# Altium PCB WeatherClock.pcbdoc
Units mm, origin at the board's own origin, x right, y up, seen from the top; angles counter-clockwise.
Board outline 60.43 x 55.02 mm, 2 copper layers (Top Layer, Bottom Layer); 34 components, 26 nets, 125 pads, 75 vias.
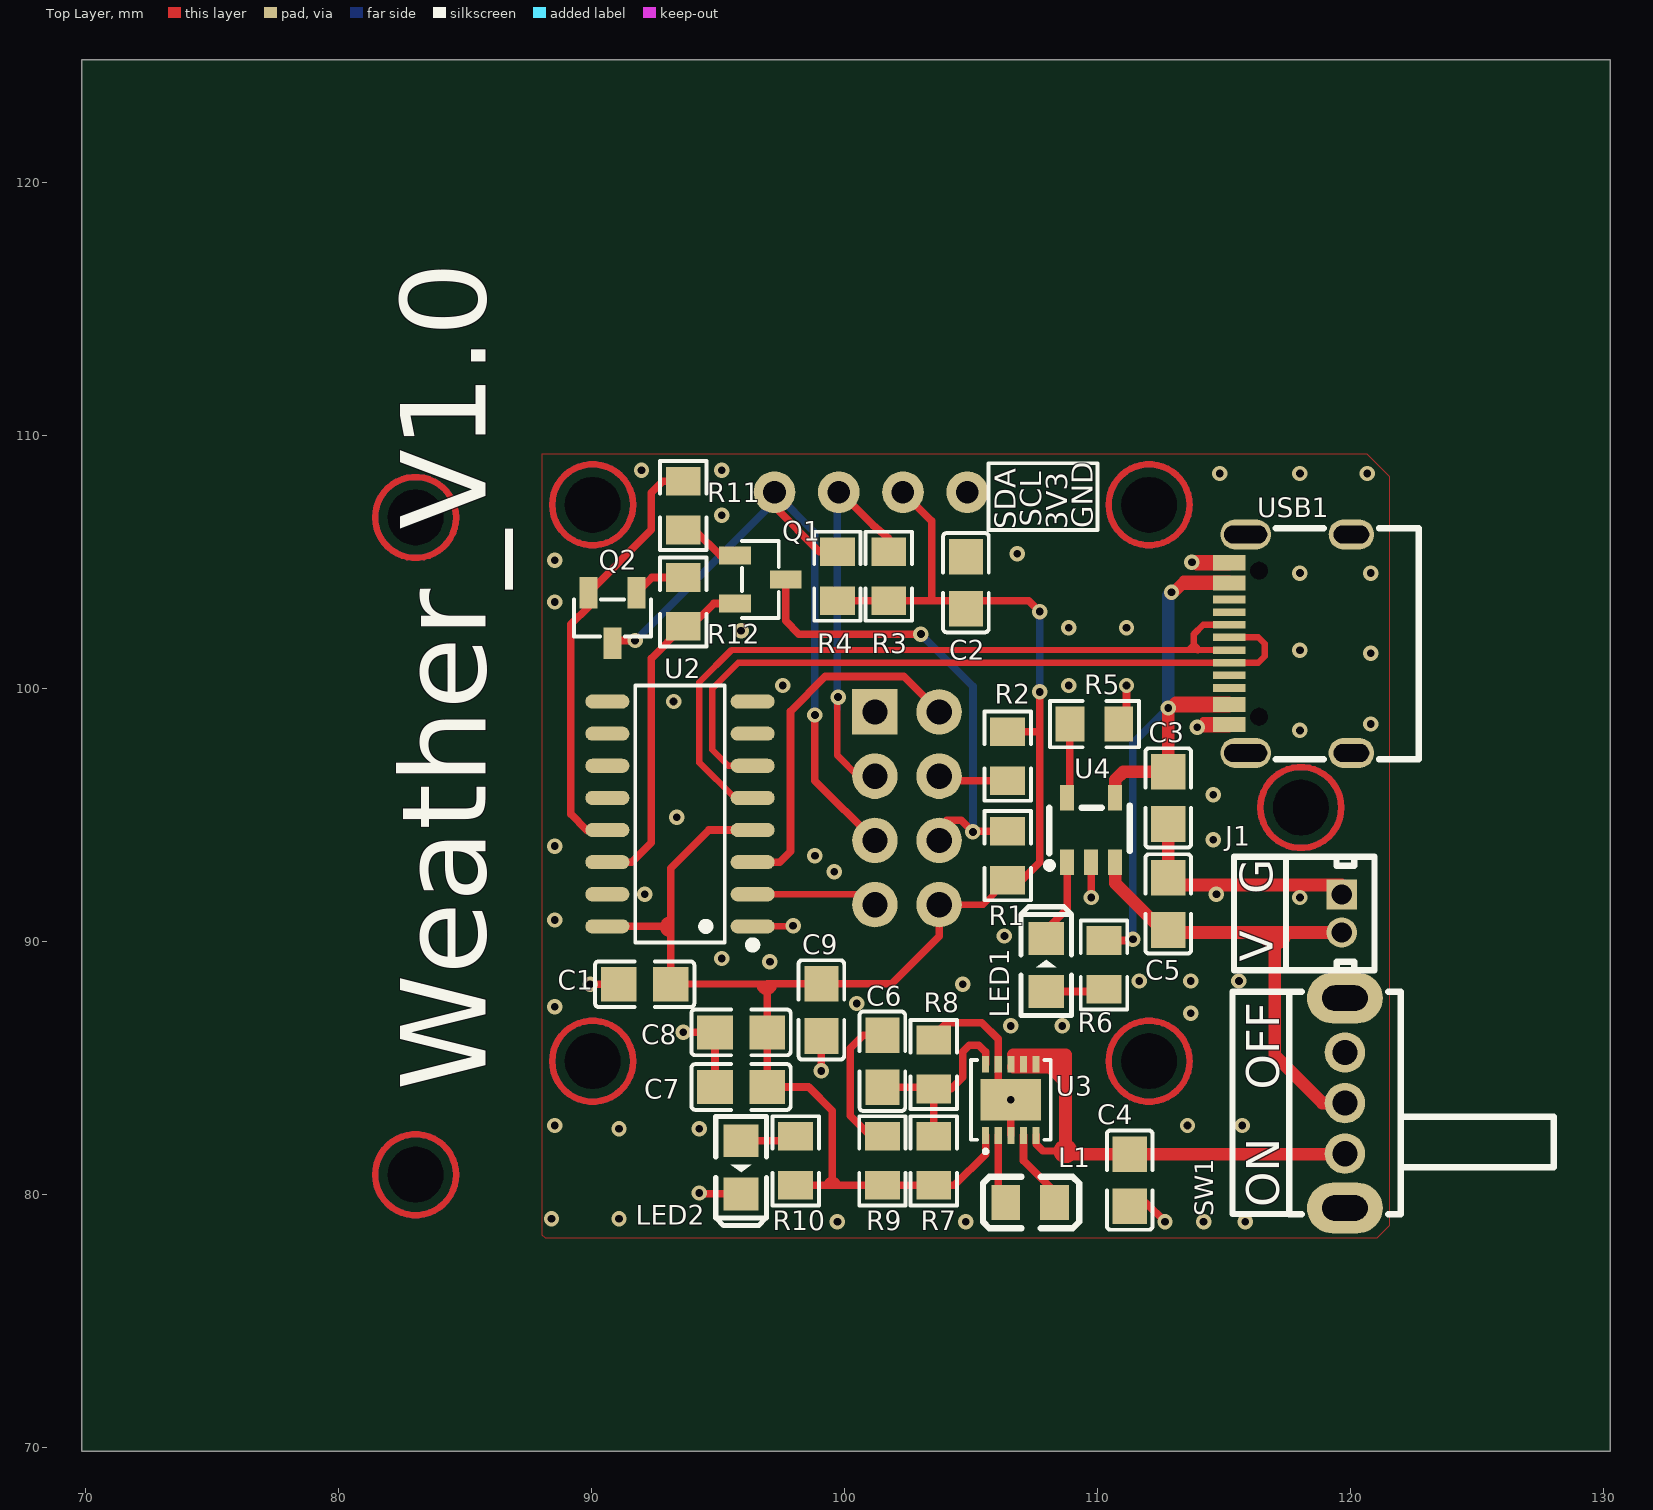
[diagram p0: Top Layer view]
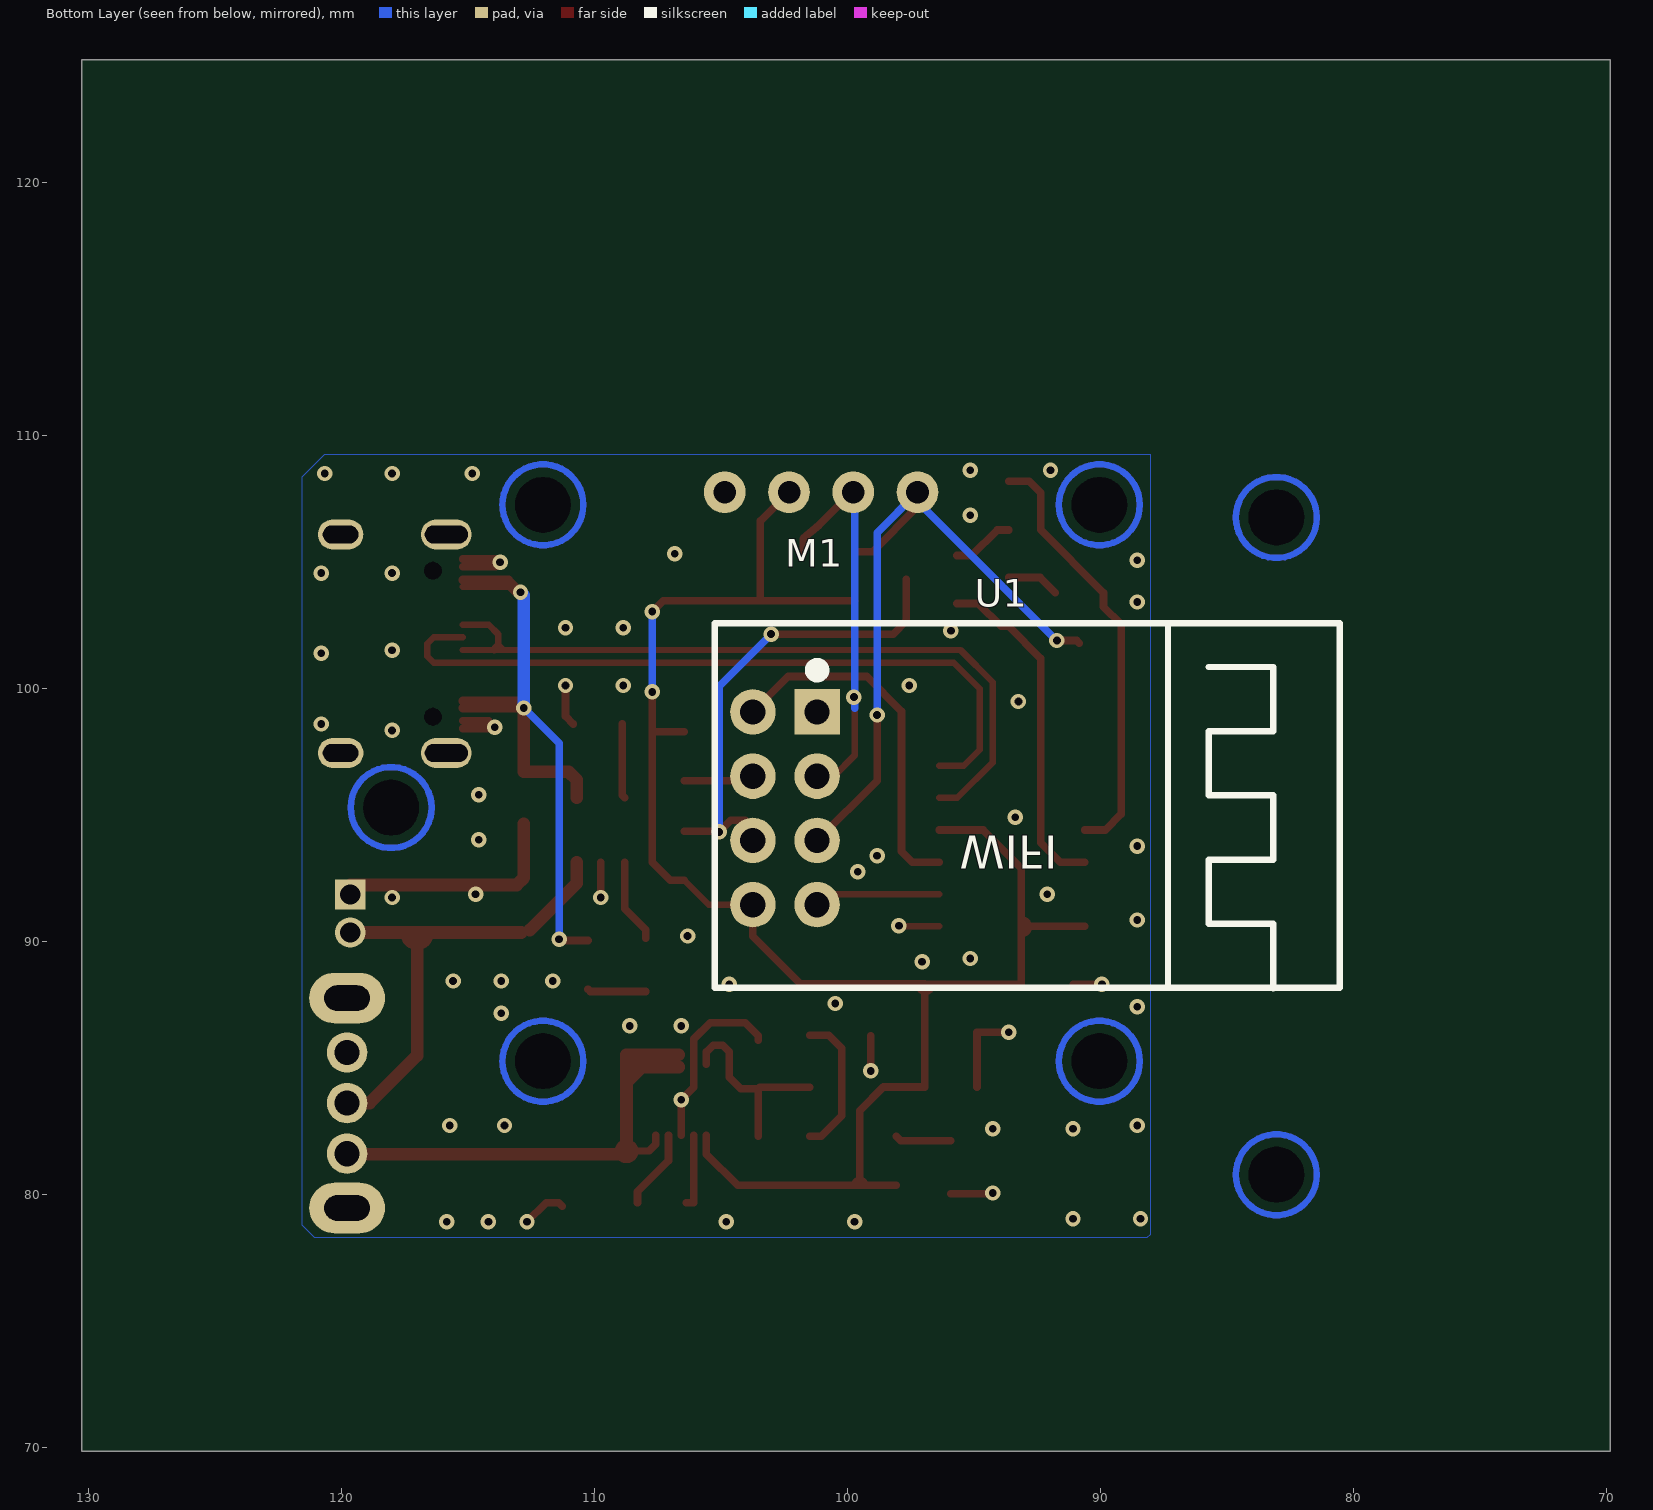
[diagram p1: Bottom Layer view, seen from below]

## Layer stack, top to bottom
Top Solder: solder mask 0.0102, Solder Resist, Dk 3.5
Top Layer: signal copper 0.0356
Dielectric 1: dielectric 0.32, FR-4, Dk 4.8
Bottom Layer: signal copper 0.0356
Bottom Solder: solder mask 0.0102, Solder Resist, Dk 3.5

## Board outline
130.283,69.85 69.85,69.85 69.85,124.869 130.283,124.869
cut-out: 91.15,107.274 ccw(c90.05,107.274) 88.95,107.274 ccw(c90.05,107.274)
cut-out: 113.15,107.274 ccw(c112.05,107.274) 110.95,107.274 ccw(c112.05,107.274)
cut-out: 91.15,85.274 ccw(c90.05,85.274) 88.95,85.274 ccw(c90.05,85.274)
cut-out: 113.15,85.274 ccw(c112.05,85.274) 110.95,85.274 ccw(c112.05,85.274)
cut-out: 84.15,106.774 ccw(c83.05,106.774) 81.95,106.774 ccw(c83.05,106.774)
cut-out: 84.15,80.786 ccw(c83.05,80.786) 81.95,80.786 ccw(c83.05,80.786)
cut-out: 119.15,95.304 ccw(c118.05,95.304) 116.95,95.304 ccw(c118.05,95.304)

## Components (designator, comment, footprint, x,y, rotation, side; value= is the part's Value field where it differs from the comment)
C1 "0.1uF" C0805 92.107,88.319 r0 top
C2 "0.1uF" C0805 104.807,104.194 r270 top
C3 "10uF" C0805 112.808,95.685 r270 top
C4 "10uF" C0805 111.284,80.572 r90 top
C5 "10uF" C0805 112.808,91.494 r270 top
C6 "68pF" C0805 101.505,85.271 r90 top
C7 "22uF" C0805 95.917,84.255 r0 top
C8 "22uF" C0805 95.917,86.414 r0 top
C9 "10uF" C0805 99.092,87.303 r90 top
J1 "ZH1.5_2P" CONN-TH_B2B-ZR-3.4-LF-SN 119.666,91.113 r90 top
L1 "3.3uH" L0805 107.347,79.683 r180 top
LED1 "红灯" LED0805_RED 107.982,89.081 r90 top
LED2 "蓝灯" LED0805_BLUE 95.917,81.08 r270 top
M1 "OLED-0.96-12864-IIC" OLED-0.96-12864-IIC_4PIN 101.05,109.274 r180 bottom
Q1 "S8050" SOT-23-3_L2.9-W1.3-P1.90-LS2.4-BR 96.679,104.321 r180 top
Q2 "S8050" SOT-23-3_L2.9-W1.3-P1.90-LS2.4-BR 90.837,102.797 r90 top
R1 "10k" R0805 106.458,93.399 r270 top
R2 "10k" R0805 106.458,97.336 r90 top
R3 "4.7k" R0805 101.759,104.448 r270 top
R4 "4.7k" R0805 99.727,104.448 r270 top
R5 "2k" R0805 109.887,98.606 r0 top
R6 "1k" R0805 110.268,89.081 r90 top
R7 "820k" R0805 103.537,81.334 r270 top
R8 "143k" R0805 103.537,85.144 r270 top
R9 "750k" R0805 101.505,81.334 r270 top
R10 "1K" R0805 98.076,81.334 r270 top
R11 "10k" R0805 93.631,107.242 r90 top
R12 "10k" R0805 93.631,103.432 r270 top
SW1 "" SW-TH_SK12D07VG6 119.793,83.62 r90 top
U1 "ESP-01S_C503582" WIFIM-TH_8P-L24.7-W14.4-P2.54 102.48,95.274 r180 bottom
U2 "CH340C" SOP-16_L10.0-W3.9-P1.27-LS6.0-BL 93.504,95.05 r90 top
U3 "MP2155GQ-Z" QFN-10_L3.0-W3.0-P0.50-LS3.0-BL-EP 106.585,83.747 r0 top
U4 "" SOT-23-5_L3.0-W1.7-P0.95-LS2.8-TL 109.76,94.415 r90 top
USB1 "KH-TYPE-C-16P" USB-C-SMD_KH-TYPE-C-16P 117.634,101.781 r90 top

## Footprints (in the part's own frame and the unit in brackets; to place one, negate y for a bottom-side part, rotate by r counter-clockwise, add the part's x,y. Pads: shape width x height; smd on the part's side, far side on the other; paste and mask are expansions set on the pad)
C0805 [mm]
  rect 1.41x1.35 smd: 1(-1.03,0) 2(1.03,0)
  silkscreen extent -1.96,-0.9 1.96,0.9
CONN-TH_B2B-ZR-3.4-LF-SN [mm]
  rect 1.2x1.2 hole 0.8: 1(0.75,0.001)
  round 1.2 hole 0.8: 2(-0.75,-0.001)
  silkscreen extent -2.25,-1.3 2.25,2.2
L0805 [mm]
  rect 1.133x1.377 smd: 1(-0.966,0) 2(0.966,0)
  silkscreen extent -1.95,-1.02 1.86,1.02
LED0805_BLUE [mm]
  rect 1.3x1.4 smd: 1(-1.05,0) 2(1.05,0)
  silkscreen extent -2,-1 2.3,1
LED0805_RED [mm]
  rect 1.3x1.4 smd: 1(-1.05,0) 2(1.05,0)
  silkscreen extent -2,-1 2.3,1
OLED-0.96-12864-IIC_4PIN [mm]
  round 1.65 hole 0.89 copper offset 0,0: 1(-3.81,-1.5) 2(-1.27,-1.5) 3(1.27,-1.5) 4(3.81,-1.5)
  Multi-Layer board cut-out: 10,-24 10.099,-23.566 10.377,-23.218 10.778,-23.025 11.223,-23.025 11.624,-23.218 11.901,-23.566 12,-24 12,-24 11.901,-24.434 11.624,-24.782 11.223,-24.975 10.778,-24.975 10.377,-24.782 10.099,-24.434 10,-24
  Multi-Layer board cut-out: -12,-24 -11.901,-23.566 -11.623,-23.218 -11.222,-23.025 -10.777,-23.025 -10.376,-23.218 -10.099,-23.566 -10,-24 -10,-24 -10.099,-24.434 -10.376,-24.782 -10.777,-24.975 -11.222,-24.975 -11.623,-24.782 -11.901,-24.434 -12,-24
  Multi-Layer board cut-out: -12,-2 -11.901,-1.566 -11.623,-1.218 -11.222,-1.025 -10.777,-1.025 -10.376,-1.218 -10.099,-1.566 -10,-2 -10,-2 -10.099,-2.434 -10.376,-2.782 -10.777,-2.975 -11.222,-2.975 -11.623,-2.782 -11.901,-2.434 -12,-2
  Multi-Layer board cut-out: 10,-2 10.099,-1.566 10.377,-1.218 10.778,-1.025 11.223,-1.025 11.624,-1.218 11.901,-1.566 12,-2 12,-2 11.901,-2.434 11.624,-2.782 11.223,-2.975 10.778,-2.975 10.377,-2.782 10.099,-2.434 10,-2
QFN-10_L3.0-W3.0-P0.50-LS3.0-BL-EP [mm]
  rect 0.28x0.665 smd: 1(-1,-1.407) 2(-0.5,-1.407) 3(0,-1.407) 4(0.5,-1.407) 5(1,-1.407) 6(1,1.407) 7(0.5,1.407) 8(0,1.407) 9(-0.5,1.407) 10(-1,1.407)
  rect 2.4x1.65 smd: 11(0,0)
  silkscreen extent -1.58,-2.11 1.58,1.58
R0805 [mm]
  rect 1.133x1.377 smd: 1(-0.966,0) 2(0.966,0)
  silkscreen extent -1.76,-0.92 1.76,0.92
SOP-16_L10.0-W3.9-P1.27-LS6.0-BL [mm]
  oval 0.56x1.745 smd: 1(-4.445,-2.872) 2(-3.175,-2.872) 3(-1.905,-2.872) 4(-0.635,-2.872) 5(0.635,-2.872) 6(1.905,-2.872) 7(3.175,-2.872) 8(4.445,-2.872) 9(4.445,2.872) 10(3.175,2.872) 11(1.905,2.872) 12(0.635,2.872) 13(-0.635,2.872) 14(-1.905,2.872) 15(-3.175,2.872) 16(-4.445,2.872)
  silkscreen extent -5.33,-3.02 5.08,1.77
SOT-23-3_L2.9-W1.3-P1.90-LS2.4-BR [mm]
  rect 1.25x0.7 smd: 1(1,-0.95) 2(1,0.95) 3(-1,0)
  silkscreen extent -0.73,-1.53 0.73,1.53
SOT-23-5_L3.0-W1.7-P0.95-LS2.8-TL [mm]
  rect 1x0.55 smd: 1(-1.272,0.95) 2(-1.272,0) 3(-1.272,-0.95) 4(1.271,-0.95) 5(1.271,0.95)
  silkscreen extent -1.52,-1.52 0.97,1.78
SW-TH_SK12D07VG6 [mil]
  round 63 hole 39.4: 1(-78.7,0) 2(0,0) 3(78.7,0)
  oval 78.7x118.1 hole 39.4 slot 70.9 at 90 deg: 4(163.4,0) 5(-163.4,0)
  silkscreen extent -173,-325 173,87
USB-C-SMD_KH-TYPE-C-16P [mm]
  oval 1.2x2 hole 0.7 slot 1.7 at 90 deg: 1(-4.32,1.765) 2(4.32,1.765)
  oval 1.2x1.8 hole 0.7 slot 1.4 at 90 deg: 3(-4.32,-2.415) 4(4.32,-2.415)
  rect 0.3x1.3 smd: A1(-3.35,2.415) A4(-2.55,2.415) A5(-1.25,2.415) A6(-0.25,2.415) A7(0.25,2.415) A8(1.25,2.415) A9(2.55,2.415) A12(3.35,2.415) B1(3.05,2.415) B4(2.25,2.415) B5(1.75,2.415) B6(0.75,2.415) B7(-0.75,2.415) B8(-1.75,2.415) B9(-2.25,2.415) B12(-3.05,2.415)
  Multi-Layer board cut-out: -2.89,0.885 -2.738,0.92 -2.616,1.017 -2.549,1.157 -2.549,1.313 -2.616,1.453 -2.738,1.55 -2.89,1.585 -2.89,1.585 -3.042,1.55 -3.164,1.453 -3.231,1.313 -3.231,1.157 -3.164,1.017 -3.042,0.92 -2.89,0.885
  Multi-Layer board cut-out: 2.89,0.885 3.042,0.92 3.164,1.017 3.231,1.157 3.231,1.313 3.164,1.453 3.042,1.55 2.89,1.585 2.89,1.585 2.738,1.55 2.616,1.453 2.549,1.313 2.549,1.157 2.616,1.017 2.738,0.92 2.89,0.885
  silkscreen extent -4.57,-5.08 4.57,0.57
WIFIM-TH_8P-L24.7-W14.4-P2.54 [mm]
  rect 1.8x1.8 hole 1: 1(1.27,3.81)
  round 1.8 hole 1: 2(1.27,1.27) 3(1.27,-1.27) 4(1.27,-3.81) 5(-1.27,3.81) 6(-1.27,1.27) 7(-1.27,-1.27) 8(-1.27,-3.81)
  silkscreen extent -2.77,-7.11 21.93,7.31

## Via types
v1: diameter 0.61, hole 0.305, Top Layer to Bottom Layer, 75 vias

## Nets (pads, with @x,y where several pads share a name; then routed paths per layer and width w, separated by ;. In a path a pad name is that pad's centre, name@x,y a point inside that pad or via, vN(x,y) a via of type N, cw(c..) or ccw(c..) an arc to the next point about the centre after c; other vN are vias at no path point)
3V3: C1.2 C2.2 C7.2 C8.2 C9.2 M1.2 R1.2 R2.2 R3.2 R4.2 R7.2 R9.2 R10.2 U1.8 U2.4 U2.16 U3.1 | length 73.6
  Top Layer w0.254: U1.8 105.489,91.463 R1.2
  Top Layer w0.3: U2.16 93.137,90.605 C1.2 96.947,88.333 ; 93.123,90.859 ccw(c93.123,90.593) 93.132,90.328 ; 93.137,90.478 93.137,92.905 94.647,94.415 U2.4 ; 96.662,88.318 ccw(c96.933,88.318) 97.203,88.319 ; R10.2 R9.2 R7.2 104.349,80.367 105.585,81.604 U3.1 ; 99.332,80.367 cw(c99.524,80.367) 99.715,80.367 ; 99.524,80.367 99.526,83.312 98.584,84.255 C7.2 C8.2 96.947,88.333 ; R4.2 R3.2 107.297,103.481 v1(107.728,103.051) ; M1.2@102.32,107.772 103.461,106.632 103.461,103.482 ; U1.8 103.75,90.208 101.874,88.333 C9.2 96.947,88.333 ; R1.2 107.017,92.433 107.728,93.145 107.728,98.301 ; R2.2@106.458,98.301 107.728,98.301 ; v1(107.728,99.876) 107.728,98.301
  Bottom Layer w0.3: v1(107.728,99.876) v1(107.728,103.051)
$1N117: R2.1 U1.6 | length 3
  Top Layer w0.3: U1.6@103.75,97.033 104.414,96.369 R2.1
$1N208: R5.1 U4.5 | length 3
  Top Layer w0.3: U4.5 108.921,95.797 R5.1
$1N240: LED1.2 U4.1 | length 3.4
  Top Layer w0.3: LED1.2 107.982,90.478 108.81,91.306 U4.1@108.81,93.142
$1N269: LED1.1 R6.1 | length 2.3
  Top Layer w0.3: LED1.1 110.184,88.03 R6.1
$1N381: L1.1 U3.4 | length 3.2
  Top Layer w0.3: U3.4@107.085,82.339 107.085,81.341 108.312,80.114 L1.1@108.312,79.683
$1N382: L1.2 U3.2 | length 3
  Top Layer w0.3: U3.2 106.085,79.683 L1.2
$1N451: C6.2 R9.1 | length 5.8
  Top Layer w0.3: R9.1@101.505,82.299 101.048,82.299 100.235,83.112 100.235,85.779 100.755,86.299 C6.2@101.505,86.299
$1N452: C6.1 R7.1 R8.2 U3.10 | length 7.9
  Top Layer w0.3: C6.1 103.473,84.241 R8.2 R7.1 ; R8.2 104.223,84.178 104.68,84.636 104.68,85.652 104.934,85.906 105.315,85.906 105.584,85.636 U3.10@105.584,85.154
$1N528: LED2.1 R10.1 | length 2.2
  Top Layer w0.3: LED2.1 97.906,82.13 R10.1
$1N584: Q1.1 R11.1 | length 2.5
  Top Layer w0.3: R11.1 94.088,106.276 95.094,105.271 Q1.1@95.678,105.271
$1N585: Q2.1 R12.1 | length 2.1
  Top Layer w0.3: Q2.1 92.388,104.398 R12.1
BAT_IN: C5.2 J1.2 SW1.2 U4.3 | length 20.4
  Top Layer w0.5: U4.3@110.71,93.143 110.71,92.322 C5.2@112.568,90.464 ; C5.2@112.909,90.363 117.024,90.363 ; 116.618,90.325 ccw(c117.024,90.325) 117.43,90.325 ; J1.2@119.667,90.097 J1.2 117.024,90.363 ; SW1.2@120.047,83.62 118.904,83.62 117.024,85.499 117.024,90.363
BAT_OUT: C4.2 SW1.1 U3.5 U3.6 U3.7 U3.8 | length 23.6
  Top Layer w0.3: U3.5 107.586,81.984 107.84,81.727 108.966,81.715
  Top Layer w0.5: U3.8@106.686,85.042 108.654,85.042 ; 106.686,85.525 108.744,85.525 108.744,81.602 C4.2 119.774,81.602 SW1.1 ; 108.187,85.04 108.187,84.995 108.744,84.438 ; 108.363,85.271 108.65,84.984 108.744,84.984 ; 108.966,81.715 ccw(c108.744,81.715) 108.966,81.715
DTR: Q2.2 R11.2 U2.13 | length 17.2
  Top Layer w0.3: U2.13 89.821,94.415 89.186,95.05 89.186,102.543 89.887,103.244 Q2.2 92.361,106.282 92.361,107.75 92.818,108.207 R11.2@93.631,108.207
GND: C1.1 C2.1 C3.2 C4.1 C5.1 C7.1 C8.1 C9.1 J1.1 LED2.2 M1.1 R5.2 R8.1 U1.1 U2.1 U3.3 U3.9 U3.11 U4.2 USB1.A1 USB1.A12 USB1.B1 USB1.B12 | length 36.4
  Top Layer w0.254: U2.1 97.949,90.605 v1(97.974,90.63)
  Top Layer w0.3: v1(89.948,88.319) C1.1 ; v1(93.631,86.414) C8.1 94.887,86.301 C7.1 ; v1(94.266,80.064) 94.3,80.029 LED2.2 ; v1(99.092,84.89) C9.1 ; R8.1@103.537,86.109 103.537,86.287 104.045,86.795 105.442,86.795 106.084,86.152 U3.9 106.085,84.246 v1(106.585,83.747) U3.3 ; v1(109.76,91.748) U4.2@109.76,93.143 ; R5.2 111.157,98.909 v1(111.157,100.13) ; C4.1 111.425,79.683 111.919,79.683 v1(112.681,78.921) ; v1@113.697,104.956 v1(113.745,105.004) 113.918,104.831 USB1.B1 ; v1@113.745,105.131 USB1.A12 ; v1@113.951,98.352 v1@113.951,98.43 ; v1@113.999,98.43 v1@114.029,98.43 ; v1@114.029,98.557 114.202,98.73 USB1.B12 ; USB1.A1 v1@114.029,98.43 ; v1@113.951,98.43 v1@113.951,98.509 ; v1@113.951,98.43 113.951,98.557 v1@113.951,98.509 ; v1@113.951,98.509 v1@114.029,98.43
  Top Layer w0.5: C3.2 C5.1 113.088,92.244 J1.1@119.665,92.244
  other v1: 99.727,78.921 104.807,78.921 114.205,78.921 115.856,78.921 88.424,79.048 91.091,79.048 91.091,82.604 94.266,82.604 88.551,82.731 113.57,82.731 115.729,82.731 106.585,86.668 108.617,86.668 113.697,87.176 88.551,87.43 100.489,87.557 104.68,88.319 111.665,88.446 113.697,88.446 115.602,88.446 97.06,89.208 95.155,89.335 106.331,90.224 88.551,90.859 118.015,91.748 92.107,91.875 114.713,91.875 99.6,92.764 98.838,93.399 88.551,93.78 114.586,94.034 93.377,94.923 114.586,95.812 118.015,98.352 113.951,98.479 120.809,98.606 93.25,99.495 97.568,100.13 108.871,100.13 120.809,101.4 118.015,101.527 95.917,102.289 108.871,102.416 111.157,102.416 88.551,103.432 118.015,104.575 120.809,104.575 88.551,105.083 106.839,105.337 95.155,106.861 114.84,108.512 118.015,108.512 120.682,108.512 91.98,108.639 95.155,108.639
IIC_SCL: M1.3 R3.1 U1.2 | length 16
  Top Layer w0.254: v1(99.752,99.672) 99.727,99.647 99.727,97.361 100.544,96.543 U1.2
  Top Layer w0.3: M1.3@99.78,107.772 99.831,107.772 101.124,106.48 101.759,105.939 R3.1@101.759,105.413
  Bottom Layer w0.3: 99.727,99.241 v1@99.727,99.647 ; v1(99.752,99.672) v1@99.727,99.647 ; M1.3 99.727,107.721 v1@99.727,99.647
IIC_SDA: M1.4 Q2.3 R4.1 U1.3 | length 28.3
  Top Layer w0.3: Q2.3 90.948,101.908 v1(91.726,101.908) ; M1.4 97.24,107.189 99.015,105.414 R4.1 ; v1(98.838,98.961) 98.838,96.37 101.205,94.003 U1.3
  Bottom Layer w0.3: v1(91.726,101.908) 97.24,107.422 M1.4 98.838,106.176 v1(98.838,98.961)
NRST: Q1.3 R1.1 U1.7 | length 19.4
  Top Layer w0.3: Q1.3 97.68,102.685 98.203,102.162 v1(103.029,102.162) ; U1.7@103.75,94.503 104.042,94.796 104.629,94.796 v1(105.086,94.338) 105.113,94.365 R1.1
  Bottom Layer w0.3: v1(103.029,102.162) 105.087,100.103 105.087,94.797 ; 105.087,94.797 105.086,94.796 v1(105.086,94.338) 105.087,94.34 105.087,94.797
RTS: Q1.2 R12.2 U2.14 | length 13.6
  Top Layer w0.3: U2.14 91.599,93.145 92.361,93.907 92.361,101.195 R12.2 ; R12.2 93.936,102.466 94.84,103.371 Q1.2@95.678,103.371
RXD: U1.5 U2.3 | length 14.2
  Top Layer w0.3: U2.3 97.441,93.145 97.873,93.576 97.873,99.114 99.244,100.485 102.348,100.485 U1.5
TXD: U1.4 U2.2 | length 5
  Top Layer w0.254: U2.2 100.799,91.875 U1.4
USB+: U2.5 USB1.A6 USB1.B6 | length 30
  Top Layer w0.254: U2.5@96.376,95.685 95.663,95.685 94.266,97.082 94.266,100.257 95.541,101.532 113.824,101.532 ; 113.671,101.532 cw(c113.824,101.532) 113.977,101.529 ; USB1.A6 113.824,101.532 ; USB1.B6 114.193,102.531 113.824,102.162 113.824,101.532
USB-: U2.6 USB1.A7 USB1.B7 | length 28.7
  Top Layer w0.254: U2.6@96.376,96.955 95.409,96.955 94.774,97.59 94.774,100.003 95.802,101.031 115.217,101.031 116.364,101.031 116.618,101.285 116.618,101.781 116.368,102.031 USB1.A7
USB_5V: C3.1 R6.2 U4.4 USB1.A4 USB1.A9 USB1.B4 USB1.B9 | length 30.8
  Top Layer w0.254: v1(112.935,103.813) 113.189,103.813 113.407,104.031 USB1.B4
  Top Layer w0.3: R6.2 111.361,90.047 v1(111.411,90.097)
  Top Layer w0.35: v1(112.935,103.813) 113.417,104.295 USB1.A9@115.219,104.295 ; USB1.A4@115.209,99.241 v1(112.808,99.241) 113.087,99.52 USB1.B9@115.208,99.52
  Top Layer w0.5: U4.4@110.71,95.686 110.71,96.395 111.03,96.715 C3.1 v1(112.808,99.241)
  Bottom Layer w0.3: v1(111.411,90.097) 111.411,97.844 v1(112.808,99.241)
  Bottom Layer w0.5: v1(112.808,99.241) 112.808,103.686 v1(112.935,103.813)
"": 
pads on no net: SW1.3 SW1.4 SW1.5 U2.7 U2.8 U2.9 U2.10 U2.11 U2.12 U2.15 USB1.1 USB1.2 USB1.3 USB1.4 USB1.A5 USB1.A8 USB1.B5 USB1.B8
copper on no net: | length 140.7
  Top Layer w0.254: 84.65,80.786 ccw(c83.05,80.786) 84.65,80.786 ; 84.65,106.774 ccw(c83.05,106.774) 84.65,106.774 ; 91.65,85.274 ccw(c90.05,85.274) 91.65,85.274 ; 91.65,107.274 ccw(c90.05,107.274) 91.65,107.274 ; 113.65,85.274 ccw(c112.05,85.274) 113.65,85.274 ; 113.65,107.274 ccw(c112.05,107.274) 113.65,107.274 ; 119.65,95.304 ccw(c118.05,95.304) 119.65,95.304
  Bottom Layer w0.254: 84.65,80.786 ccw(c83.05,80.786) 84.65,80.786 ; 84.65,106.774 ccw(c83.05,106.774) 84.65,106.774 ; 91.65,85.274 ccw(c90.05,85.274) 91.65,85.274 ; 91.65,107.274 ccw(c90.05,107.274) 91.65,107.274 ; 113.65,85.274 ccw(c112.05,85.274) 113.65,85.274 ; 113.65,107.274 ccw(c112.05,107.274) 113.65,107.274 ; 119.65,95.304 ccw(c118.05,95.304) 119.65,95.304

## Polygon pours and split planes (outlines as drawn)
GND on Top Layer (solid, remove dead copper): 88.043,109.274 88.043,78.413 88.17,78.286 121.063,78.286 121.571,78.794 121.571,108.385 120.682,109.274 88.17,109.274
GND on Bottom Layer (solid, remove dead copper, pour order 1): 88.043,109.274 88.043,78.413 88.17,78.286 121.063,78.286 121.571,78.794 121.571,108.385 120.682,109.274 88.17,109.274

## Silkscreen, mask and mechanical layers (free items; w line width, h text height)
Top Overlay:
  lines w0.15: 105.696,106.276 110.014,106.276 110.014,108.918 105.696,108.918 105.696,106.276
  lines w0.254: 117.463,88.863 115.409,88.863 115.409,90.917 115.409,93.363 117.463,93.363 ; 117.593,79.22 115.348,79.251 115.348,88.019 117.593,88.019
  text "SCL" at 107.795,106.413 h0.84 r90
  text "GND" at 109.827,106.342 h0.84 r90
  text "SDA" at 106.779,106.306 h0.84 r90
  text "3V3" at 108.811,106.306 h0.84 r90
  text "G" at 116.94,91.875 h1.31 r90
  text "V" at 116.94,89.208 h1.31 r90
  text "OFF" at 117.19,84.144 h1.3 r90
  text "Weather_V1.0" at 85.816,84.106 h3.4 r90
  text "ON" at 117.19,79.502 h1.3 r90
Bottom Solder:
  text "Weather_V1.0" at 111.567,79.827 h3.4
Mechanical 1:
  circle w0.025: c90.05,107.274 r1.1
  circle w0.025: c112.05,107.274 r1.1
  circle w0.025: c90.05,85.274 r1.1
  circle w0.025: c112.05,85.274 r1.1
  circle w0.025: c83.05,106.774 r1.1
  circle w0.025: c83.05,80.786 r1.1
  circle w0.025: c118.05,95.304 r1.1
  lines w0.254: 121.545,79.278 121.55,79.274 ; 121.545,108.269 121.55,108.274 ; 121.55,79.274 121.55,108.274 ; 121.55,79.274 cw(c120.55,79.274) 120.55,78.274 81.55,78.274 cw(c81.55,79.274) 80.55,79.274 80.55,108.274 cw(c81.55,108.274) 81.55,109.274 120.55,109.274 cw(c120.55,108.274) 121.55,108.274
Mechanical 6:
  text "注：板边框距离外壳设置为3mm /     插孔边距为1.5mm" at 78.153,116.462 h3.49

## Text inside footprints (layer, text, board x,y; h text height)
U1: Bottom Overlay "WIFI" at 95.578,94.187 h1.32 r180